# Altium PCB ISO7240F.PcbDoc
Units mil, origin at the board's own origin, x right, y up, seen from the top; angles counter-clockwise.
Board outline 6000 x 4000 mil, 2 copper layers (Top Layer, Bottom Layer); 14 components, 12 nets, 45 pads, 0 vias.
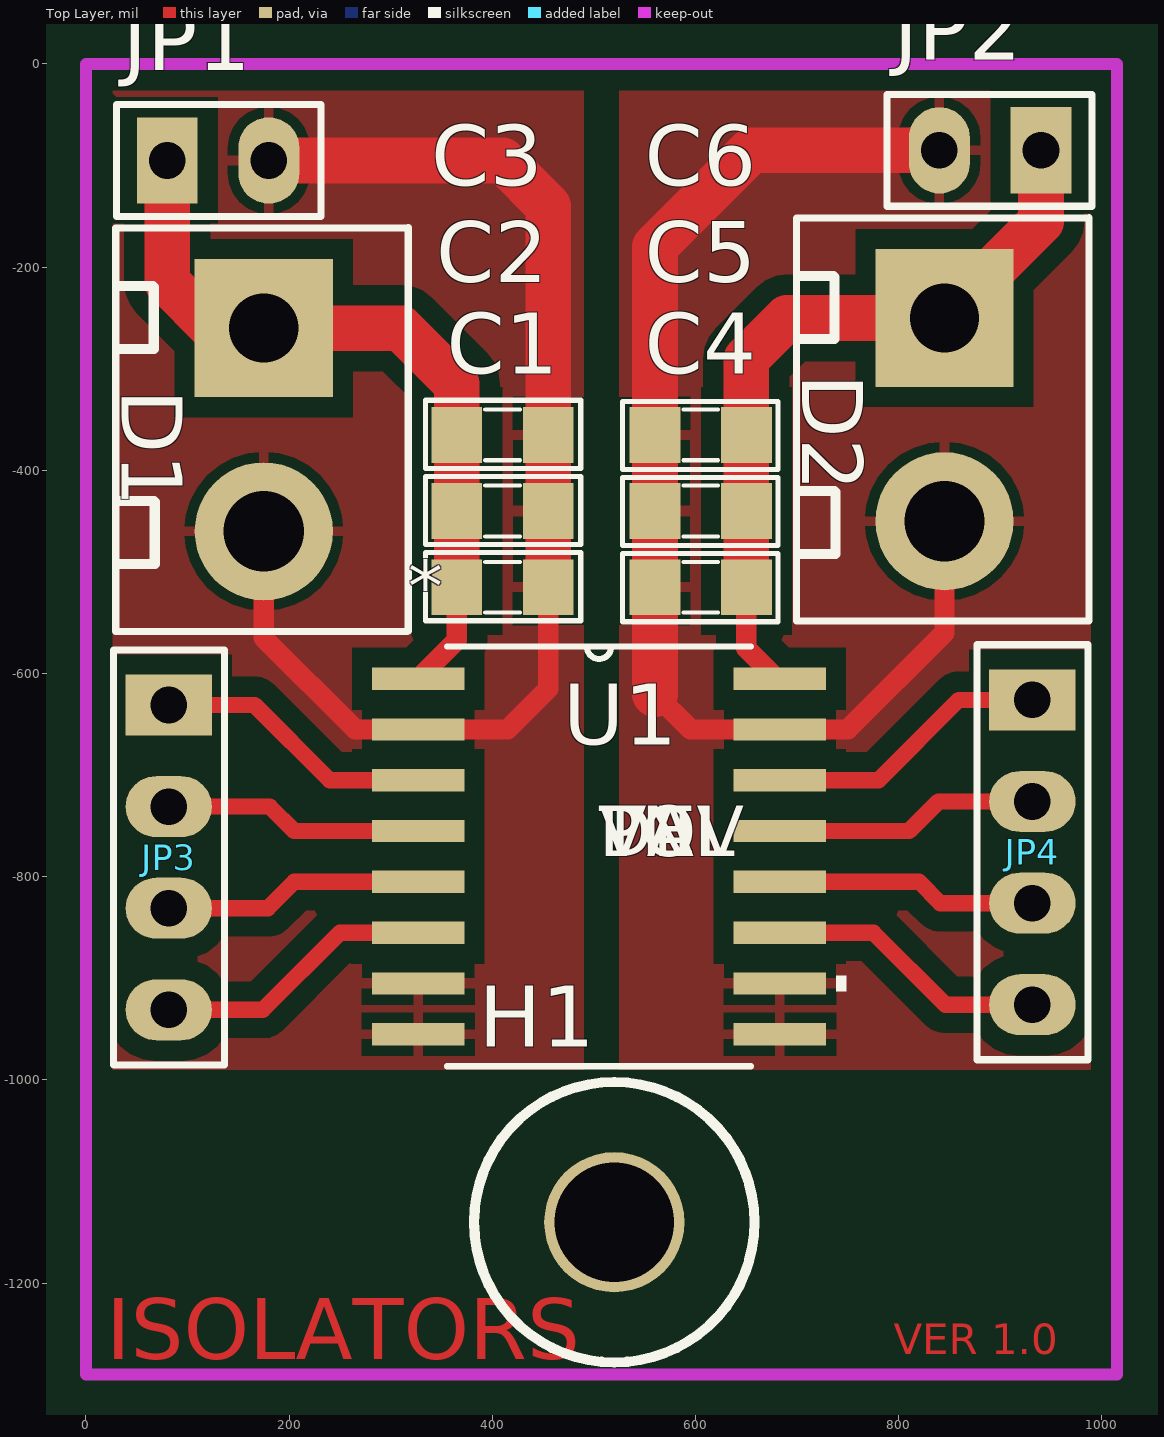
[diagram p0: Top Layer view]
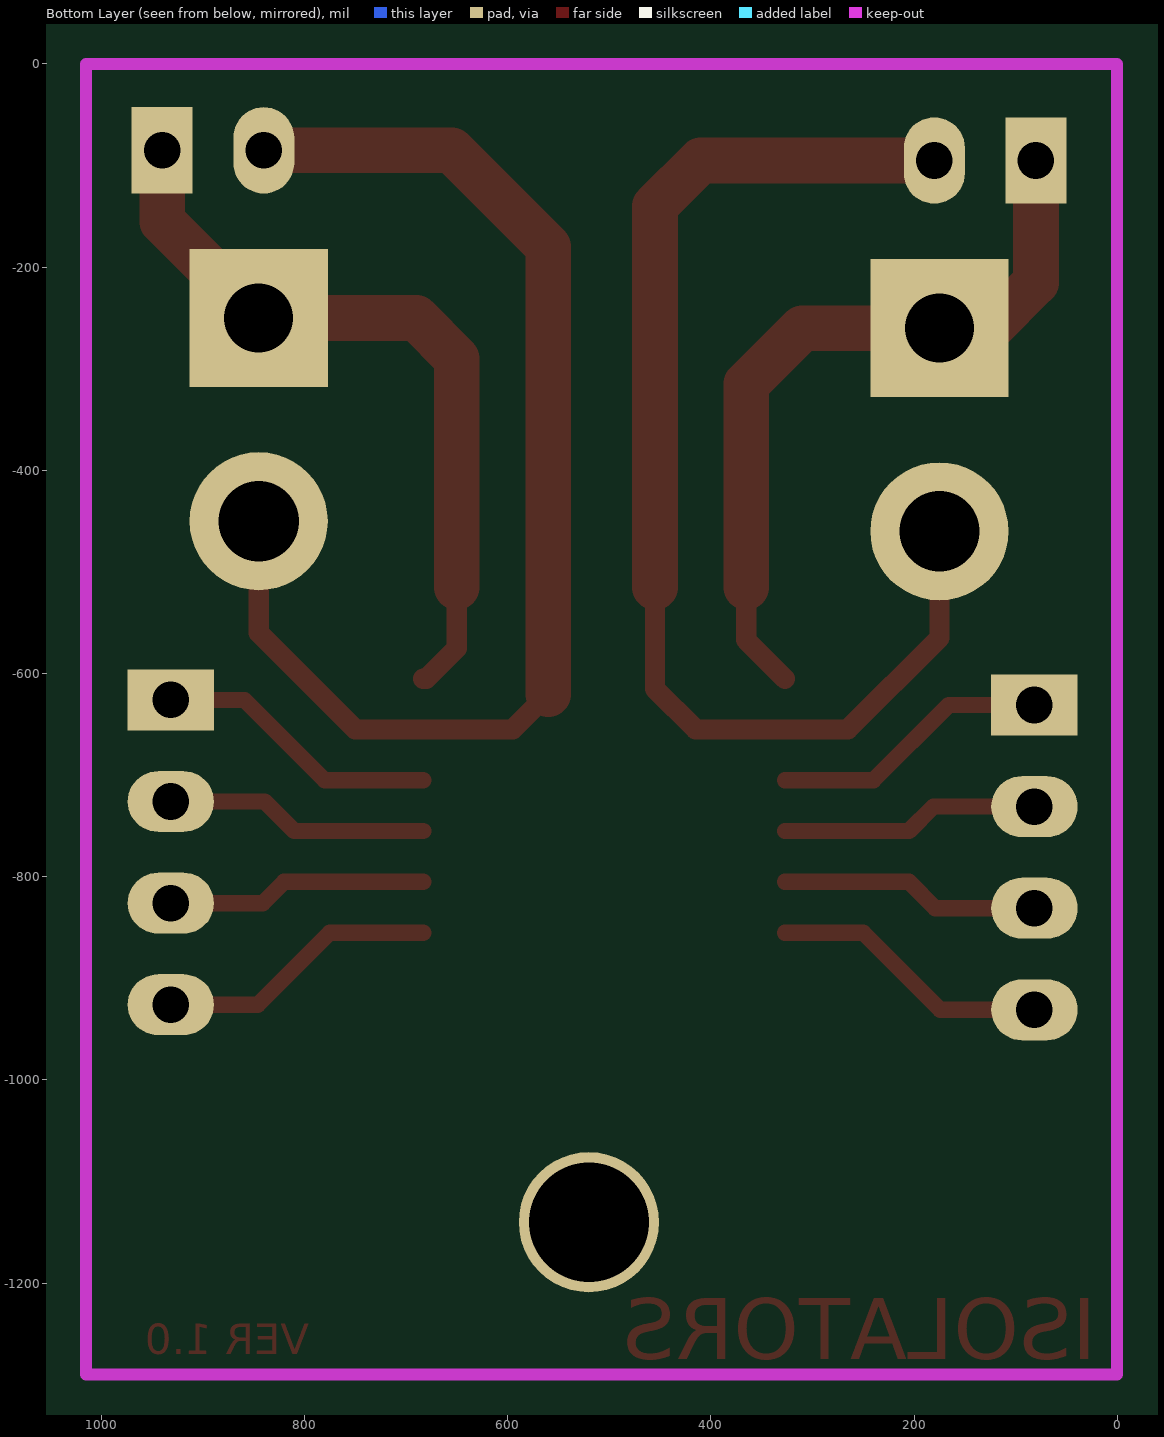
[diagram p1: Bottom Layer view, seen from below]
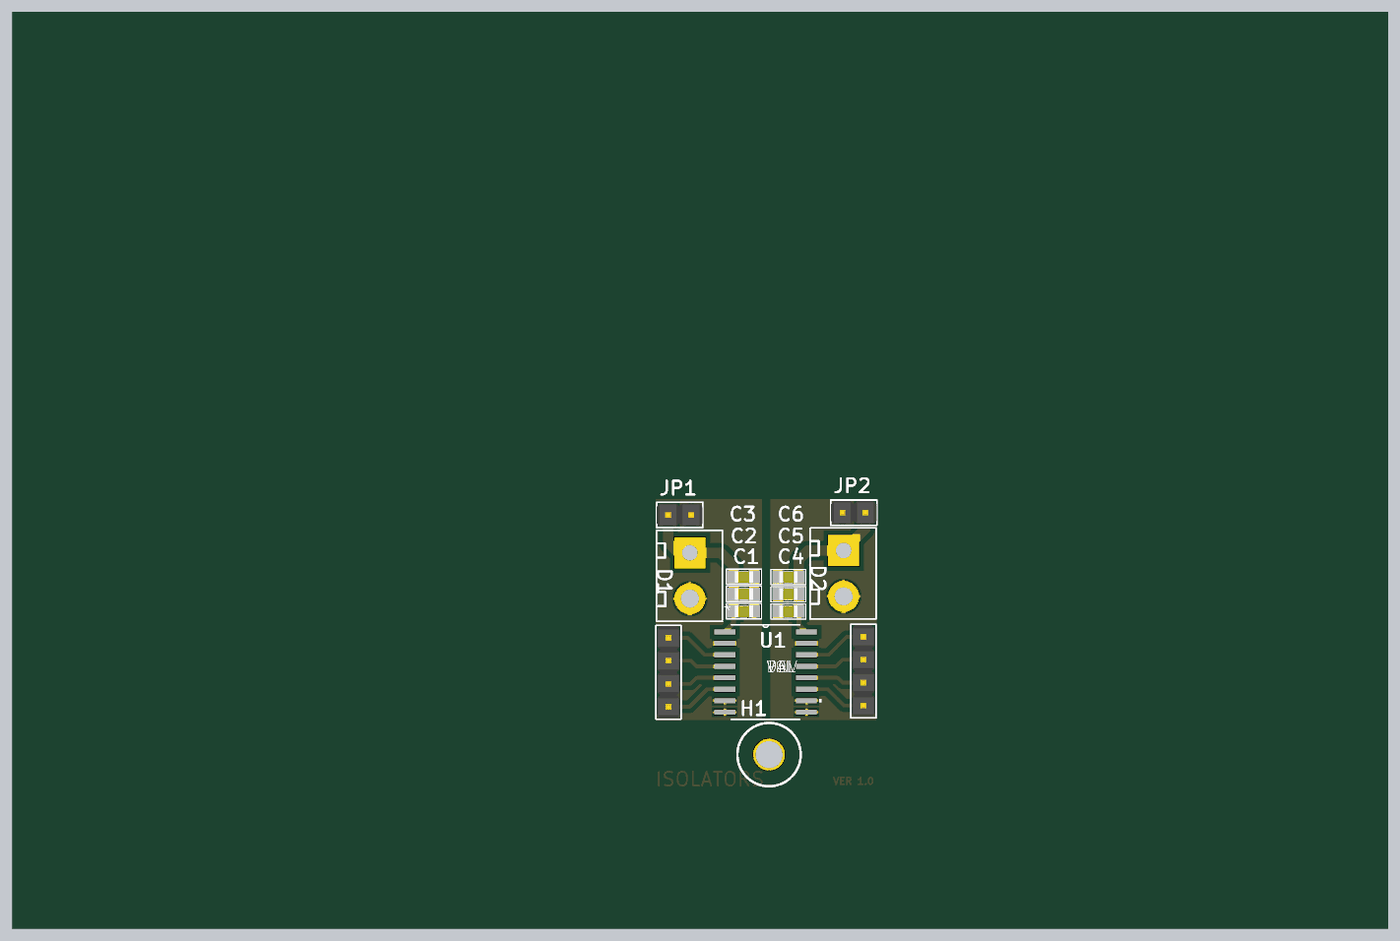
[diagram p2: 3D render of the assembled board from above, using the file's embedded part models]

## Layer stack, top to bottom
Top Solder: solder mask 0.4, Solder Resist, Dk 3.5
Top Layer: signal copper 1.4
Dielectric 1: dielectric 12.6, FR-4, Dk 4.8
Bottom Layer: signal copper 1.4
Bottom Solder: solder mask 0.4, Solder Resist, Dk 3.5

## Board outline
-2780,-1900 3220,-1900 3220,2100 -2780,2100

## Design rules (kind name [scope] priority, off if disabled: settings)
Clearance [All] p1: gap=20
PolygonConnect [All] p1: connectstyle=Relief reliefconductorwidth=10 reliefentries=4 polygonreliefangle="90 Angle" airgapwidth=10
RoutingVias [All] p1: holewidth=28 width=50 viastyle="Through Hole" minholewidth=28 minwidth=50 maxholewidth=28 maxwidth=50
SolderMaskExpansion [All] p1: expansion=4
Width [All] p1: maxlimit=50 minlimit=10 preferedwidth=16
30 further rules are at their usual default settings.

## Components (designator, comment, footprint, x,y, rotation, side; value= is the part's Value field where it differs from the comment)
C1 "1uF" 0805_C 410,-515 r180 top
C2 "10uF" 0805_C 410,-440 r180 top
C3 "0.1uF" 0805_C 410,-365 r180 top
C4 "0.1uF" 0805_C 605,-515 r0 top
C5 "1uF" 0805_C 605,-440 r0 top
C6 "10uF" 0805_C 605,-365 r0 top
D1 "DOMINO" DOMINO2 175,-260 r270 top
D2 "DOMINO" DOMINO2 845,-250 r270 top
H1 "Hole 3mm" Hole_3mm 520,-1140 r0 top
JP1 "JP2" HEAD2 80,-95 r0 top
JP2 "JP2" HEAD2 940,-85 r180 top
JP3 "JP4" HEAD4 210,-680 r270 top
JP4 "JP4" HEAD4 1060,-675 r270 top
U1 "ISO7240CF_SOIC16" DW16_ISO7240CF 505,-780 r0 top

## Footprints (in the part's own frame and the unit in brackets; to place one, negate y for a bottom-side part, rotate by r counter-clockwise, add the part's x,y. Pads: shape width x height; smd on the part's side, far side on the other; paste and mask are expansions set on the pad)
0805_C [mil]
  rect 50x55 smd: 1(-45,0) 2(45,0)
  silkscreen extent -77,-34 76,33, body extent -40,-25 40,25, height 24
DOMINO2 [mil]
  rect 136x136 hole 68: 1(0,0)
  round 136 hole 79: 2(200,0)
  silkscreen extent -99,-146 298,142
DW16_ISO7240CF [mil]
  rect 91x22 smd: 1(-178,175) 2(-178,125) 3(-178,75) 4(-178,25) 5(-178,-25) 6(-178,-75) 7(-178,-125) 8(-178,-175) 9(178,-175) 10(178,-125) 11(178,-75) 12(178,-25) 13(178,25) 14(178,75) 15(178,125) 16(178,175)
  silkscreen extent -150,-206 244,206
HEAD2 [mil]
  rect 60x85 hole 36: 1(0,0)
  oval 60x85 hole 36: 2(100,0)
  silkscreen extent -50,-55 151,55, body extent -50,-50 150,50, height 374
HEAD4 [mil]
  rect 60x85 hole 36: 1(-49.07,-128.51)
  oval 60x85 hole 36: 2(50.93,-128.51) 3(150.93,-128.51) 4(250.93,-128.51)
  silkscreen extent -103,-183 305,-74, body extent -99,-179 301,-79, height 374
Hole_3mm [mil]
  round 138 hole 118: 0(0,0)
  silkscreen extent -138,-138 138,138

## Part data
C1 C2 C3 C4 C5 C6: library part 0805_C, "0805 SMD capacitor"
D1 D2: library part Domino2_5mm
H1: library part Hole_3mm
JP1 JP2: library part HEAD2, "Connector 2"
JP3 JP4: library part HEAD4, "Connector 4"

## Nets (pads, with @x,y where several pads share a name; then routed paths per layer and width w, separated by ;. In a path a pad name is that pad's centre, name@x,y a point inside that pad or via, vN(x,y) a via of type N, cw(c..) or ccw(c..) an arc to the next point about the centre after c; other vN are vias at no path point)
GND1: C1.1 C2.1 C3.1 D1.2 JP1.2 U1.2 U1.7 U1.8 | length 1207.5
  Top Layer w20: D1.2 175,-565 265,-655 U1.2 415,-655 455,-615 C1.1
  Top Layer w45: JP1.2 410,-95 455,-140 C3.1 C2.1 C1.1
GND2: C4.1 C5.1 C6.1 D2.2 JP2.2 U1.9 U1.10 U1.15 | length 1208.2
  Top Layer w20: 560,-620 595,-655 U1.15 750,-655 845,-560 D2.2
  Top Layer w45: 560,-620 C4.1 C5.1 C6.1 560,-180 655,-85 JP2.2
NetJP3_1: JP3.1 U1.3 | length 276.2
  Top Layer w16: JP3.1 165.93,-630.93 240,-705 U1.3
NetJP3_2: JP3.2 U1.4 | length 255.5
  Top Layer w16: JP3.2 180.93,-730.93 205,-755 U1.4
NetJP3_3: JP3.3 U1.5 | length 256.3
  Top Layer w16: JP3.3 179.07,-830.93 205,-805 U1.5
NetJP3_4: JP3.4 U1.6 | length 277
  Top Layer w16: JP3.4 174.07,-930.93 250,-855 U1.6
NetJP4_1: JP4.1 U1.14 | length 281.2
  Top Layer w16: U1.14 780,-705 859.07,-625.93 JP4.1
NetJP4_2: JP4.2 U1.13 | length 260.5
  Top Layer w16: U1.13 810,-755 839.07,-725.93 JP4.2
NetJP4_3: JP4.3 U1.12 | length 257.2
  Top Layer w16: U1.12 820,-805 840.93,-825.93 JP4.3
NetJP4_4: JP4.4 U1.11 | length 277.9
  Top Layer w16: U1.11 775,-855 845.93,-925.93 JP4.4
VCC1: C1.2 C2.2 C3.2 D1.1 JP1.1 U1.1 | length 752.2
  Top Layer w20: U1.1 365,-567 C1.2
  Top Layer w45: JP1.1 80,-215 125,-260 310,-260 365,-315 C3.2 C2.2 C1.2
VCC2: C4.2 C5.2 C6.2 D2.1 JP2.1 U1.16 | length 746.3
  Top Layer w20: C4.2 650,-575 680,-605 U1.16
  Top Layer w45: C4.2 C5.2 C6.2 650,-290 690,-250 D2.1 940,-155 JP2.1
pads on no net: H1.0

## Polygon pours and split planes (outlines as drawn)
GND1 on Top Layer "TOP" (solid, pour order 2): 10,-10 490,-10 490,-990 15.11,-990 10,-984.95
GND2 on Top Layer "TOP" (solid, pour order 4): 525.11,-10 1005,-10 1005,-990 520,-990 525.11,-990

## Keep-outs
Keep-Out Layer:
  lines w11.81: 0,-1290 1015,-1290 1015,0 0,0 0,-1290

## Other copper
Top Layer:
  text "VER 1.0" at 795,-1270 h30
  text "ISOLATORS" at 20,-1275 h60

## Text inside footprints (layer, text, board x,y; h text height)
U1: Top Overlay "*" at 317,-538 h50; Top Overlay "PN" at 505,-780 h50; Top Overlay "DEV" at 505,-780 h50; Top Overlay "VAL" at 505,-780 h50; Top Overlay "TOL" at 505,-780 h50; Mechanical 1 "*" at 317,-538 h50; Mechanical 1 "RefDes2" at 505,-780 h50